# EAGLE board midi-switcher-stencil (EAGLE 9.3.0)
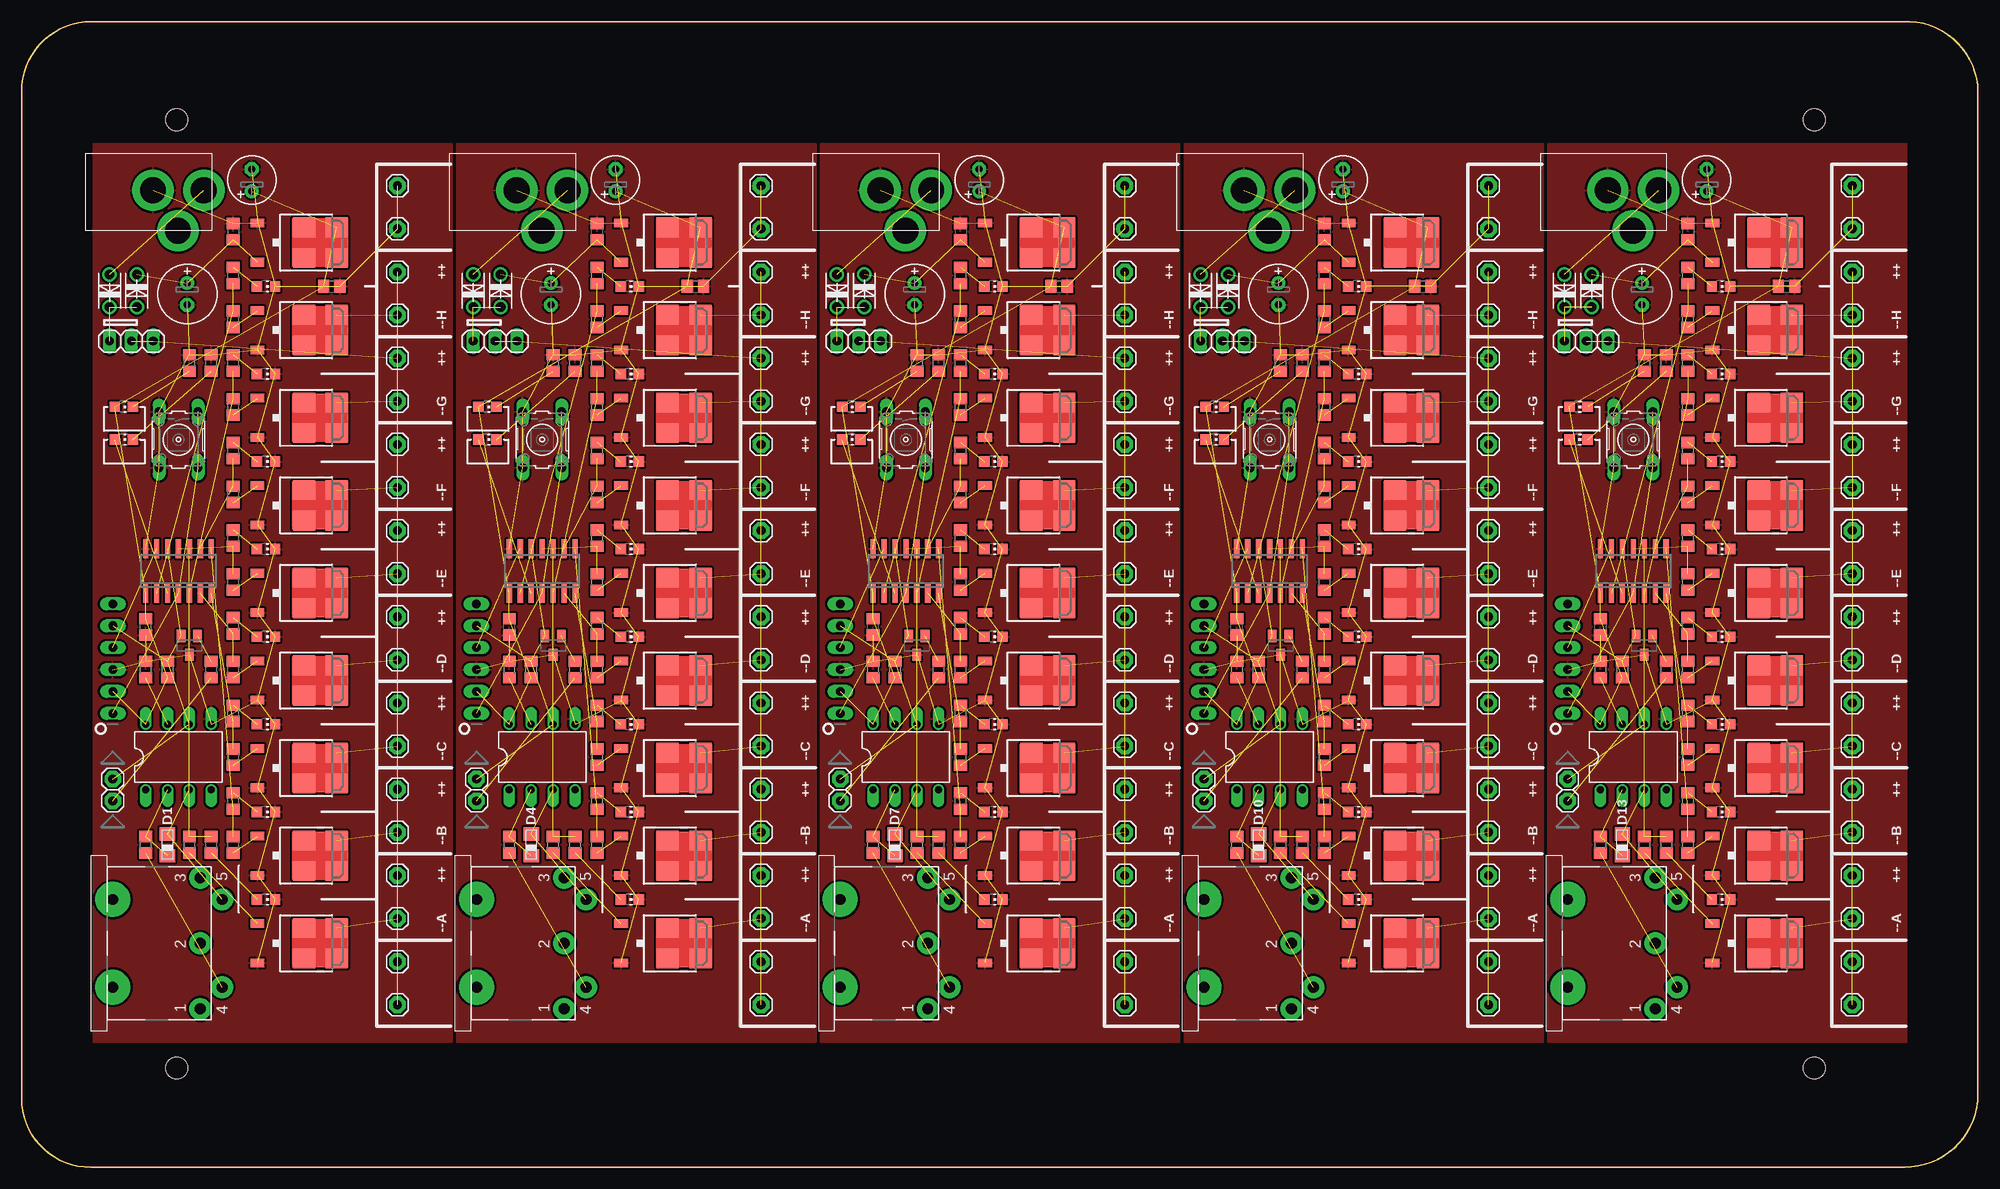
[diagram p0: board, top side]
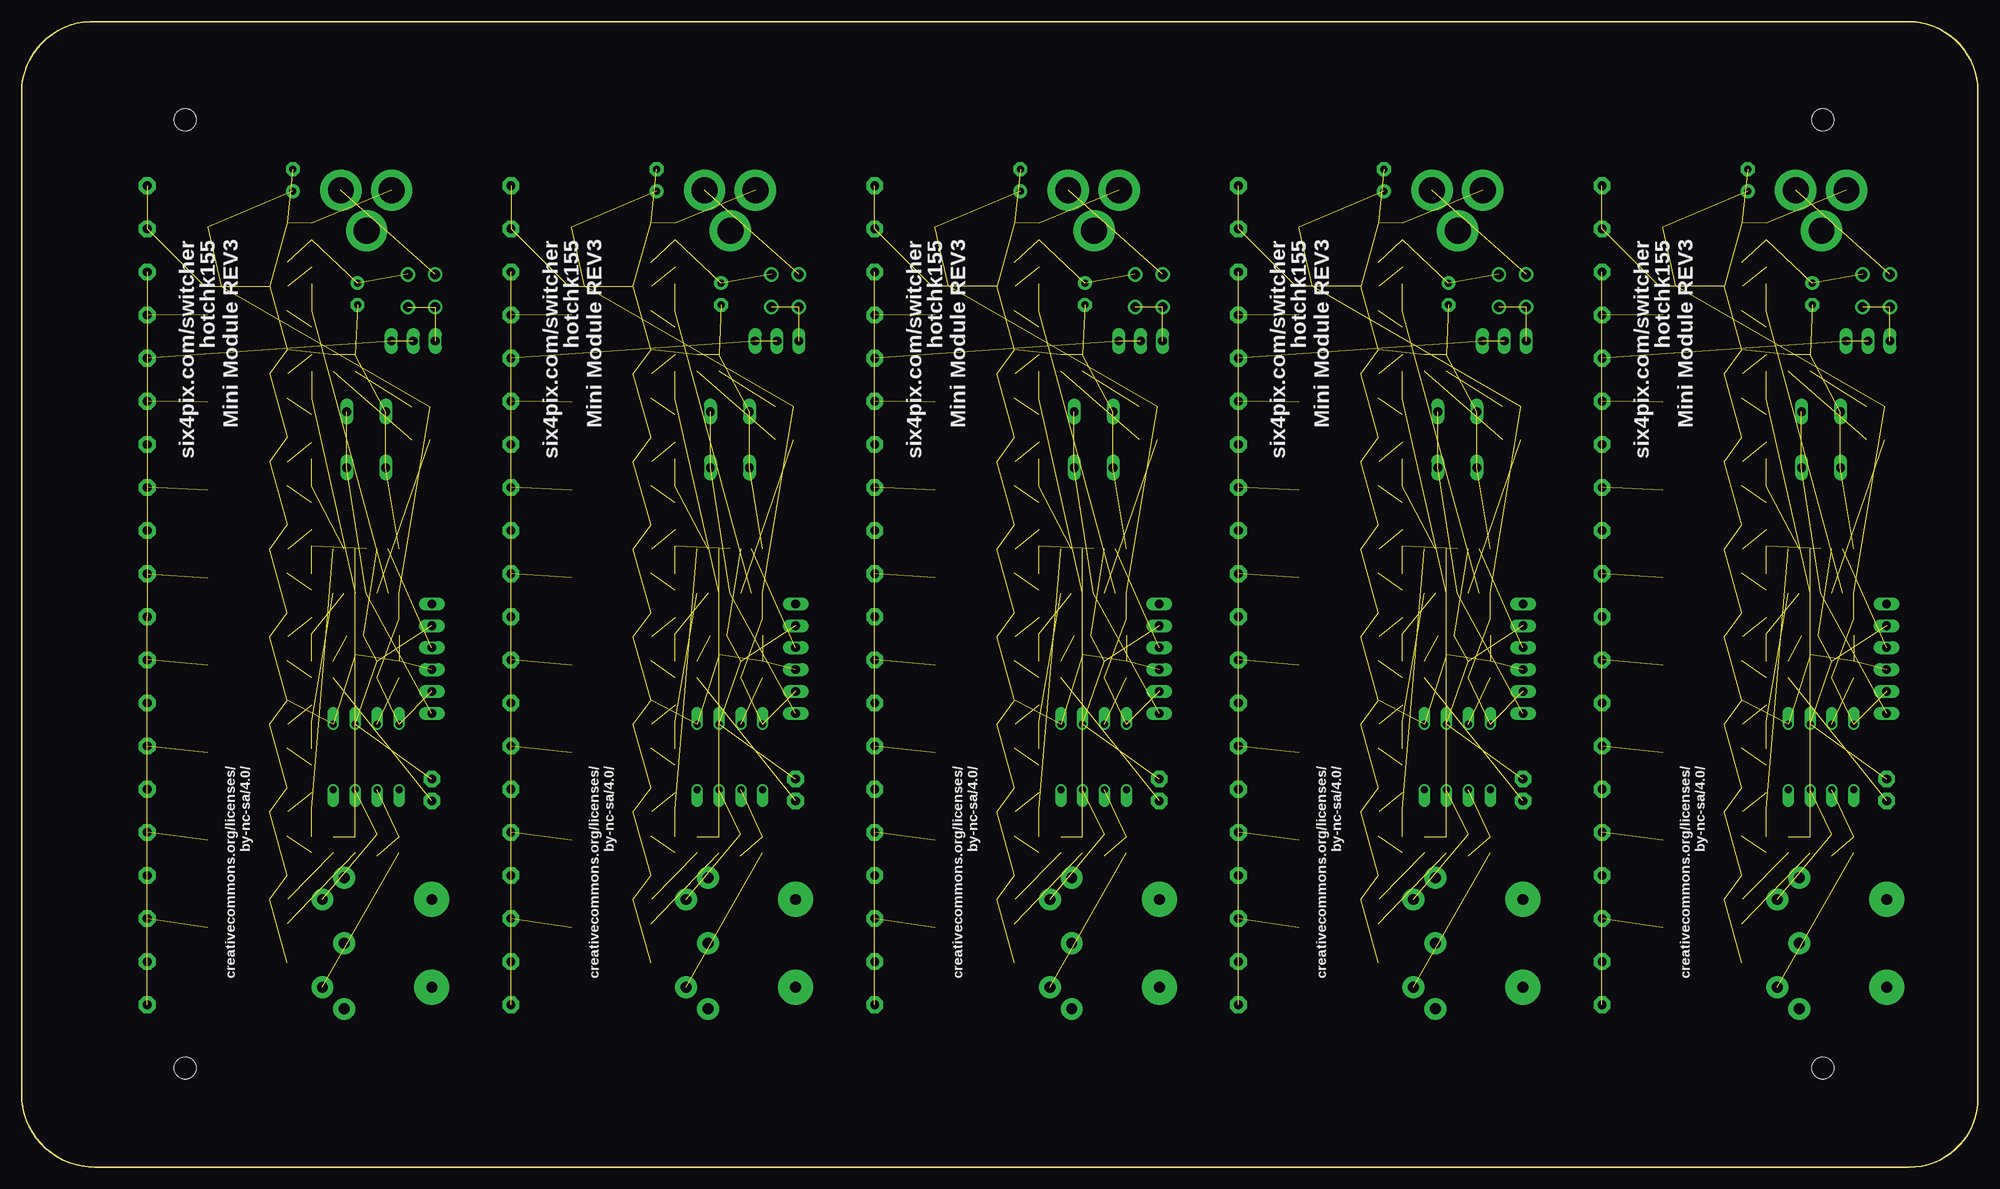
[diagram p1: board, bottom side, seen from below]

Size 227 x 132.9 mm. Coordinates in mm from the lower left corner, seen from the top.
Outline: 0,124.8 0,8 arc90 8,0 218.5,0 arc90 227,8.5 227,124.7 arc87 219.1,132.9 8.1,132.9 arc90 0,124.8
Copper layers (1*16): Top 0.035mm / dielectric 1.5mm / Bottom 0.035mm
Design rules "ITEADstudio_DRC": minimum track width 6mil, minimum drill 12mil, track to track 6mil, track to pad 6mil, pad to pad 6mil, via to via 6mil, smd to smd 0mil, copper to edge 10mil, drill to drill 10mil, minimum pad ring 10mil, minimum via ring 6mil, stop-mask expansion 2mil, vias tented up to drill 100mil, thermal gap 10mil
Holes 2.54 mm at 18,121.5 208,121.5 18,11.5 208,11.5

## Footprints (pad centres in the part's own frame; a part is rotated, then mirrored left to right if it is on the bottom)
C0805 = smd 1.3 x 1.5: 1 -0.95,0; 2 0.95,0
E2,5-7 = drill 0.813 pad 1.6: + -1.27,0 | drill 0.813 pad 1.6 octagon: - 1.27,0
E2,5-6 = drill 0.813 pad 1.6: + -1.27,0 | drill 0.813 pad 1.6 octagon: - 1.27,0
1X01 = drill 1.016 pad 1.93 octagon: 1 0,0
0805DIODE = smd 1.524 x 1.778: A -1.262,-0.005; C 1.238,-0.005
DO-VERT = drill 1.118: A 2.54,0; C -1.27,0
DIL08 = drill 0.813 offset: 1 -3.81,-3.81; 2 -1.27,-3.81; 3 1.27,-3.81; 4 3.81,-3.81; 5 3.81,3.81; 6 1.27,3.81; 7 -1.27,3.81; 8 -3.81,3.81
SO14 = smd 0.6 x 2.2: 1 -3.81,-2.6; 2 -2.54,-2.6; 3 -1.27,-2.6; 4 0,-2.6; 5 1.27,-2.6; 6 2.54,-2.6; 7 3.81,-2.6; 8 3.81,2.6; 9 2.54,2.6; 10 1.27,2.6; 11 0,2.6; 12 -1.27,2.6; 13 -2.54,2.6; 14 -3.81,2.6
DPACK = smd 1 x 1.6: 1 -2.28,-4.8; 3 2.28,-4.8 | smd 2.286 x 2.54: 2 -1.778,4.405; 4 1.778,4.405; 5 -1.778,0.595; 6 1.778,0.595
1X06_OVAL = drill 1 long: 1 -6.35,0; 2 -3.81,0; 3 -1.27,0; 4 1.27,0; 5 3.81,0; 6 6.35,0
1X03 = drill 1.016 long: 1 -2.54,0; 2 0,0; 3 2.54,0
CHIP-LED0805 = smd 1.2 x 1.2: A 0,-1.05; C 0,1.05
TRUCONN90 = drill 1.27 pad 2.54: 1 7.62,5.08; 2 0,5.08; 3 -7.62,5.08; 4 5.08,7.62; 5 -5.08,7.62 | drill 1.27 pad 4.064: NC -5.08,-5.08; NC@ 5.08,-5.08
B3F-10XX = drill 1.016 long: 1 -3.251,2.261; 2 3.251,2.261; 3 -3.251,-2.261; 4 3.251,-2.261
SOT23-BEC = smd 1 x 1.4: B -0.95,-1.1; C 0,1.1; E 0.95,-1.1
R0805 = smd 1.3 x 1.5: 1 -0.95,0; 2 0.95,0
PJ-102A = drill 3 pad 4.8: RING 0.1,-3.39; RING_SW -4.6,-6.29; TIP 0.1,-9.29

## Placement (x,y rotation side)
C1  [C0805]  14.4,62.68 90 top
C2  [C0805]  35.99,102.18 0 top
C3  [C0805]  24.56,108.53 270 top
C4  [E2,5-7]  19.23,101.29 270 top
C5  [E2,5-6]  26.72,114.5 90 top
C6  [C0805]  78.19,102.18 0 top
C7  [C0805]  56.6,62.68 90 top
C8  [C0805]  66.76,108.53 270 top
C9  [E2,5-6]  68.92,114.5 90 top
C10  [E2,5-7]  61.43,101.29 270 top
C11  [C0805]  120.39,102.18 0 top
C12  [C0805]  98.8,62.68 90 top
C13  [C0805]  108.96,108.53 270 top
C14  [E2,5-6]  111.12,114.5 90 top
C15  [E2,5-7]  103.63,101.29 270 top
C16  [C0805]  162.59,102.18 0 top
C17  [C0805]  141,62.68 90 top
C18  [C0805]  151.16,108.53 270 top
C19  [E2,5-6]  153.32,114.5 90 top
C20  [E2,5-7]  145.83,101.29 270 top
C21  [C0805]  204.79,102.18 0 top
C22  [C0805]  183.2,62.68 90 top
C23  [C0805]  193.36,108.53 270 top
C24  [E2,5-6]  195.52,114.5 90 top
C25  [E2,5-7]  188.03,101.29 270 top
CHAIN_NEXT  [1X01]  10.59,45.03 90 top
CHAIN_NEXT1  [1X01]  52.79,45.03 90 top
CHAIN_NEXT2  [1X01]  94.99,45.03 90 top
CHAIN_NEXT3  [1X01]  137.19,45.03 90 top
CHAIN_NEXT4  [1X01]  179.39,45.03 90 top
CHAIN_PREV  [1X01]  10.59,42.49 90 top
CHAIN_PREV1  [1X01]  52.79,42.49 90 top
CHAIN_PREV2  [1X01]  94.99,42.49 90 top
CHAIN_PREV3  [1X01]  137.19,42.49 90 top
CHAIN_PREV4  [1X01]  179.39,42.49 90 top
D1  0805DIODE  [0805DIODE]  16.94,37.41 90 top
D2  1N4004  [DO-VERT]  10.21,101.04 90 top
D3  1N4004  [DO-VERT]  13.38,102.31 270 top
D4  0805DIODE  [0805DIODE]  59.14,37.41 90 top
D5  1N4004  [DO-VERT]  55.58,102.31 270 top
D6  1N4004  [DO-VERT]  52.41,101.04 90 top
D7  0805DIODE  [0805DIODE]  101.34,37.41 90 top
D8  1N4004  [DO-VERT]  97.78,102.31 270 top
D9  1N4004  [DO-VERT]  94.61,101.04 90 top
D10  0805DIODE  [0805DIODE]  143.54,37.41 90 top
D11  1N4004  [DO-VERT]  139.98,102.31 270 top
D12  1N4004  [DO-VERT]  136.81,101.04 90 top
D13  0805DIODE  [0805DIODE]  185.74,37.41 90 top
D14  1N4004  [DO-VERT]  182.18,102.31 270 top
D15  1N4004  [DO-VERT]  179.01,101.04 90 top
E$1  [STENCILPIN]  18,121.5 0 top
E$2  [STENCILPIN]  208,121.5 0 top
E$3  [STENCILPIN]  208,11.5 0 top
E$4  [STENCILPIN]  18,11.5 0 top
IC1  6N138  [DIL08]  18.21,47.57 0 top
IC2  PIC16F1825SO14  [SO14]  18.21,69.16 0 top
IC3  LD1086  [DPACK]  32.18,107.26 270 top
IC4  PIC16F1825SO14  [SO14]  60.41,69.16 0 top
IC5  6N138  [DIL08]  60.41,47.57 0 top
IC6  LD1086  [DPACK]  74.38,107.26 270 top
IC7  PIC16F1825SO14  [SO14]  102.61,69.16 0 top
IC8  6N138  [DIL08]  102.61,47.57 0 top
IC9  LD1086  [DPACK]  116.58,107.26 270 top
IC10  PIC16F1825SO14  [SO14]  144.81,69.16 0 top
IC11  6N138  [DIL08]  144.81,47.57 0 top
IC12  LD1086  [DPACK]  158.78,107.26 270 top
IC13  PIC16F1825SO14  [SO14]  187.01,69.16 0 top
IC14  6N138  [DIL08]  187.01,47.57 0 top
IC15  LD1086  [DPACK]  200.98,107.26 270 top
ICSP  [1X06_OVAL]  10.59,59 90 top
ICSP1  [1X06_OVAL]  52.79,59 90 top
ICSP2  [1X06_OVAL]  94.99,59 90 top
ICSP3  [1X06_OVAL]  137.19,59 90 top
ICSP4  [1X06_OVAL]  179.39,59 90 top
JP1  [1X03]  54.95,95.83 0 top
JP2  [1X03]  97.15,95.83 0 top
JP3  [1X03]  12.75,95.83 0 top
JP4  [1X03]  139.35,95.83 0 top
JP5  [1X03]  181.55,95.83 0 top
L1  [CHIP-LED0805]  11.86,84.4 270 top
L2  [CHIP-LED0805]  11.86,88.21 270 top
L3  [CHIP-LED0805]  28.37,31.06 270 top
L4  [CHIP-LED0805]  28.37,41.22 270 top
L5  [CHIP-LED0805]  28.37,51.38 270 top
L6  [CHIP-LED0805]  28.37,61.54 270 top
L7  [CHIP-LED0805]  28.37,71.7 270 top
L8  [CHIP-LED0805]  28.37,81.86 270 top
L9  [CHIP-LED0805]  28.37,92.02 270 top
L10  [CHIP-LED0805]  28.37,102.18 270 top
L11  [CHIP-LED0805]  70.57,102.18 270 top
L12  [CHIP-LED0805]  70.57,92.02 270 top
L13  [CHIP-LED0805]  70.57,81.86 270 top
L14  [CHIP-LED0805]  70.57,71.7 270 top
L15  [CHIP-LED0805]  70.57,61.54 270 top
L16  [CHIP-LED0805]  70.57,51.38 270 top
L17  [CHIP-LED0805]  70.57,41.22 270 top
L18  [CHIP-LED0805]  70.57,31.06 270 top
L19  [CHIP-LED0805]  54.06,88.21 270 top
L20  [CHIP-LED0805]  54.06,84.4 270 top
L21  [CHIP-LED0805]  112.77,102.18 270 top
L22  [CHIP-LED0805]  112.77,92.02 270 top
L23  [CHIP-LED0805]  112.77,81.86 270 top
L24  [CHIP-LED0805]  112.77,71.7 270 top
L25  [CHIP-LED0805]  112.77,61.54 270 top
L26  [CHIP-LED0805]  112.77,51.38 270 top
L27  [CHIP-LED0805]  112.77,41.22 270 top
L28  [CHIP-LED0805]  112.77,31.06 270 top
L29  [CHIP-LED0805]  96.26,88.21 270 top
L30  [CHIP-LED0805]  96.26,84.4 270 top
L31  [CHIP-LED0805]  154.97,102.18 270 top
L32  [CHIP-LED0805]  154.97,92.02 270 top
L33  [CHIP-LED0805]  154.97,81.86 270 top
L34  [CHIP-LED0805]  154.97,71.7 270 top
L35  [CHIP-LED0805]  154.97,61.54 270 top
L36  [CHIP-LED0805]  154.97,51.38 270 top
L37  [CHIP-LED0805]  154.97,41.22 270 top
L38  [CHIP-LED0805]  154.97,31.06 270 top
L39  [CHIP-LED0805]  138.46,88.21 270 top
L40  [CHIP-LED0805]  138.46,84.4 270 top
L41  [CHIP-LED0805]  197.17,102.18 270 top
L42  [CHIP-LED0805]  197.17,92.02 270 top
L43  [CHIP-LED0805]  197.17,81.86 270 top
L44  [CHIP-LED0805]  197.17,71.7 270 top
L45  [CHIP-LED0805]  197.17,61.54 270 top
L46  [CHIP-LED0805]  197.17,51.38 270 top
L47  [CHIP-LED0805]  197.17,41.22 270 top
L48  [CHIP-LED0805]  197.17,31.06 270 top
L49  [CHIP-LED0805]  180.66,88.21 270 top
L50  [CHIP-LED0805]  180.66,84.4 270 top
MIDI_IN  DIN5PIN"  [TRUCONN90]  15.67,25.98 270 top
MIDI_IN1  DIN5PIN"  [TRUCONN90]  57.87,25.98 270 top
MIDI_IN2  DIN5PIN"  [TRUCONN90]  100.07,25.98 270 top
MIDI_IN3  DIN5PIN"  [TRUCONN90]  142.27,25.98 270 top
MIDI_IN4  DIN5PIN"  [TRUCONN90]  184.47,25.98 270 top
MODE  [B3F-10XX]  18.21,84.4 270 top
MODE1  [B3F-10XX]  60.41,84.4 270 top
MODE2  [B3F-10XX]  102.61,84.4 270 top
MODE3  [B3F-10XX]  144.81,84.4 270 top
MODE4  [B3F-10XX]  187.01,84.4 270 top
OP1+  [1X01]  43.61,33.85 90 top
OP1+1  [1X01]  85.81,33.85 90 top
OP1+2  [1X01]  128.01,33.85 90 top
OP1+3  [1X01]  170.21,33.85 90 top
OP1+4  [1X01]  212.41,33.85 90 top
OP1-  [1X01]  43.61,98.85 90 top
OP1-1  [1X01]  85.81,98.85 90 top
OP1-2  [1X01]  128.01,98.85 90 top
OP1-3  [1X01]  170.21,98.85 90 top
OP1-4  [1X01]  212.41,98.85 90 top
OP2+  [1X01]  43.61,103.85 90 top
OP2+1  [1X01]  85.81,103.85 90 top
OP2+2  [1X01]  128.01,103.85 90 top
OP2+3  [1X01]  170.21,103.85 90 top
OP2+4  [1X01]  212.41,103.85 90 top
OP2-  [1X01]  43.61,88.85 90 top
OP2-1  [1X01]  85.81,88.85 90 top
OP2-2  [1X01]  128.01,88.85 90 top
OP2-3  [1X01]  170.21,88.85 90 top
OP2-4  [1X01]  212.41,88.85 90 top
OP3+  [1X01]  43.61,93.85 90 top
OP3+1  [1X01]  85.81,93.85 90 top
OP3+2  [1X01]  128.01,93.85 90 top
OP3+3  [1X01]  170.21,93.85 90 top
OP3+4  [1X01]  212.41,93.85 90 top
OP3-  [1X01]  43.61,78.85 90 top
OP3-1  [1X01]  85.81,78.85 90 top
OP3-2  [1X01]  128.01,78.85 90 top
OP3-3  [1X01]  170.21,78.85 90 top
OP3-4  [1X01]  212.41,78.85 90 top
OP4+  [1X01]  43.61,83.85 90 top
OP4+1  [1X01]  85.81,83.85 90 top
OP4+2  [1X01]  128.01,83.85 90 top
OP4+3  [1X01]  170.21,83.85 90 top
OP4+4  [1X01]  212.41,83.85 90 top
OP4-  [1X01]  43.61,68.85 90 top
OP4-1  [1X01]  85.81,68.85 90 top
OP4-2  [1X01]  128.01,68.85 90 top
OP4-3  [1X01]  170.21,68.85 90 top
OP4-4  [1X01]  212.41,68.85 90 top
OP5+  [1X01]  43.61,73.85 90 top
OP5+1  [1X01]  85.81,73.85 90 top
OP5+2  [1X01]  128.01,73.85 90 top
OP5+3  [1X01]  170.21,73.85 90 top
OP5+4  [1X01]  212.41,73.85 90 top
OP5-  [1X01]  43.61,58.85 90 top
OP5-1  [1X01]  85.81,58.85 90 top
OP5-2  [1X01]  128.01,58.85 90 top
OP5-3  [1X01]  170.21,58.85 90 top
OP5-4  [1X01]  212.41,58.85 90 top
OP6-  [1X01]  43.61,48.85 90 top
OP6-1  [1X01]  85.81,48.85 90 top
OP6-2  [1X01]  128.01,48.85 90 top
OP6-3  [1X01]  170.21,48.85 90 top
OP6-4  [1X01]  212.41,48.85 90 top
OP7+  [1X01]  43.61,53.85 90 top
OP7+1  [1X01]  85.81,53.85 90 top
OP7+2  [1X01]  128.01,53.85 90 top
OP7+3  [1X01]  170.21,53.85 90 top
OP7+4  [1X01]  212.41,53.85 90 top
OP7-  [1X01]  43.61,38.85 90 top
OP7-1  [1X01]  85.81,38.85 90 top
OP7-2  [1X01]  128.01,38.85 90 top
OP7-3  [1X01]  170.21,38.85 90 top
OP7-4  [1X01]  212.41,38.85 90 top
OP8+  [1X01]  43.61,43.85 90 top
OP8+1  [1X01]  43.61,63.85 90 top
OP8+2  [1X01]  85.81,43.85 90 top
OP8+3  [1X01]  85.81,63.85 90 top
OP8+4  [1X01]  128.01,43.85 90 top
OP8+5  [1X01]  128.01,63.85 90 top
OP8+6  [1X01]  170.21,43.85 90 top
OP8+7  [1X01]  170.21,63.85 90 top
OP8+8  [1X01]  212.41,43.85 90 top
OP8+9  [1X01]  212.41,63.85 90 top
OP8-  [1X01]  43.61,28.85 90 top
OP8-1  [1X01]  85.81,28.85 90 top
OP8-2  [1X01]  128.01,28.85 90 top
OP8-3  [1X01]  170.21,28.85 90 top
OP8-4  [1X01]  212.41,28.85 90 top
POWER+1  [1X01]  43.61,23.85 90 top
POWER+2  [1X01]  43.61,18.85 90 top
POWER+3  [1X01]  85.81,23.85 90 top
POWER+4  [1X01]  85.81,18.85 90 top
POWER+5  [1X01]  128.01,23.85 90 top
POWER+6  [1X01]  128.01,18.85 90 top
POWER+7  [1X01]  170.21,23.85 90 top
POWER+8  [1X01]  170.21,18.85 90 top
POWER+9  [1X01]  212.41,23.85 90 top
POWER+10  [1X01]  212.41,18.85 90 top
POWER-1  [1X01]  43.61,113.85 90 top
POWER-2  [1X01]  43.61,108.85 90 top
POWER-3  [1X01]  85.81,113.85 90 top
POWER-4  [1X01]  85.81,108.85 90 top
POWER-5  [1X01]  128.01,113.85 90 top
POWER-6  [1X01]  128.01,108.85 90 top
POWER-7  [1X01]  170.21,113.85 90 top
POWER-8  [1X01]  170.21,108.85 90 top
POWER-9  [1X01]  212.41,113.85 90 top
POWER-10  [1X01]  212.41,108.85 90 top
Q1  MJD122GDPAK  [DPACK]  32.18,25.98 270 top
Q2  MJD122GDPAK  [DPACK]  32.18,36.14 270 top
Q3  MJD122GDPAK  [DPACK]  32.18,46.3 270 top
Q4  MJD122GDPAK  [DPACK]  32.18,56.46 270 top
Q5  MJD122GDPAK  [DPACK]  32.18,66.62 270 top
Q6  MJD122GDPAK  [DPACK]  32.18,76.78 270 top
Q7  MJD122GDPAK  [DPACK]  32.18,86.94 270 top
Q8  MJD122GDPAK  [DPACK]  32.18,97.1 270 top
Q9  [SOT23-BEC]  19.48,60.52 180 top
Q10  MJD122GDPAK  [DPACK]  74.38,97.1 270 top
Q11  MJD122GDPAK  [DPACK]  74.38,86.94 270 top
Q12  MJD122GDPAK  [DPACK]  74.38,76.78 270 top
Q13  MJD122GDPAK  [DPACK]  74.38,66.62 270 top
Q14  MJD122GDPAK  [DPACK]  74.38,56.46 270 top
Q15  MJD122GDPAK  [DPACK]  74.38,46.3 270 top
Q16  MJD122GDPAK  [DPACK]  74.38,36.14 270 top
Q17  MJD122GDPAK  [DPACK]  74.38,25.98 270 top
Q18  [SOT23-BEC]  61.68,60.52 180 top
Q19  MJD122GDPAK  [DPACK]  116.58,97.1 270 top
Q20  MJD122GDPAK  [DPACK]  116.58,86.94 270 top
Q21  MJD122GDPAK  [DPACK]  116.58,76.78 270 top
Q22  MJD122GDPAK  [DPACK]  116.58,66.62 270 top
Q23  MJD122GDPAK  [DPACK]  116.58,56.46 270 top
Q24  MJD122GDPAK  [DPACK]  116.58,46.3 270 top
Q25  MJD122GDPAK  [DPACK]  116.58,36.14 270 top
Q26  MJD122GDPAK  [DPACK]  116.58,25.98 270 top
Q27  [SOT23-BEC]  103.88,60.52 180 top
Q28  MJD122GDPAK  [DPACK]  158.78,97.1 270 top
Q29  MJD122GDPAK  [DPACK]  158.78,86.94 270 top
Q30  MJD122GDPAK  [DPACK]  158.78,76.78 270 top
Q31  MJD122GDPAK  [DPACK]  158.78,66.62 270 top
Q32  MJD122GDPAK  [DPACK]  158.78,56.46 270 top
Q33  MJD122GDPAK  [DPACK]  158.78,46.3 270 top
Q34  MJD122GDPAK  [DPACK]  158.78,36.14 270 top
Q35  MJD122GDPAK  [DPACK]  158.78,25.98 270 top
Q36  [SOT23-BEC]  146.08,60.52 180 top
Q37  MJD122GDPAK  [DPACK]  200.98,97.1 270 top
Q38  MJD122GDPAK  [DPACK]  200.98,86.94 270 top
Q39  MJD122GDPAK  [DPACK]  200.98,76.78 270 top
Q40  MJD122GDPAK  [DPACK]  200.98,66.62 270 top
Q41  MJD122GDPAK  [DPACK]  200.98,56.46 270 top
Q42  MJD122GDPAK  [DPACK]  200.98,46.3 270 top
Q43  MJD122GDPAK  [DPACK]  200.98,36.14 270 top
Q44  MJD122GDPAK  [DPACK]  200.98,25.98 270 top
Q45  [SOT23-BEC]  188.28,60.52 180 top
R1  [R0805]  14.4,37.41 270 top
R2  [R0805]  19.48,37.41 90 top
R3  [R0805]  22.02,37.41 270 top
R4  [R0805]  56.6,37.41 270 top
R5  [R0805]  59.14,57.73 270 top
R6  [R0805]  56.6,57.73 270 top
R7  [R0805]  24.56,37.41 90 top
R8  [R0805]  24.56,42.49 90 top
R9  [R0805]  24.56,47.57 90 top
R10  [R0805]  24.56,52.65 90 top
R11  [R0805]  24.56,57.73 90 top
R12  [R0805]  24.56,62.81 90 top
R13  [R0805]  24.56,67.89 90 top
R14  [R0805]  24.56,72.97 90 top
R15  [R0805]  24.56,78.05 90 top
R16  [R0805]  24.56,83.13 90 top
R17  [R0805]  24.56,88.21 90 top
R18  [R0805]  24.56,93.29 90 top
R19  [R0805]  24.56,98.37 90 top
R20  [R0805]  24.56,103.45 90 top
R21  [R0805]  14.4,57.73 270 top
R22  [R0805]  16.94,57.73 270 top
R23  [R0805]  22.02,57.73 90 top
R24  [R0805]  19.48,93.29 90 top
R25  [R0805]  22.02,93.29 90 top
R26  [R0805]  66.76,98.37 90 top
R27  [R0805]  66.76,88.21 90 top
R28  [R0805]  66.76,78.05 90 top
R29  [R0805]  66.76,67.89 90 top
R30  [R0805]  66.76,57.73 90 top
R31  [R0805]  66.76,47.57 90 top
R32  [R0805]  66.76,37.41 90 top
R33  [R0805]  61.68,37.41 90 top
R34  [R0805]  66.76,103.45 90 top
R35  [R0805]  66.76,93.29 90 top
R36  [R0805]  66.76,83.13 90 top
R37  [R0805]  66.76,72.97 90 top
R38  [R0805]  66.76,62.81 90 top
R39  [R0805]  66.76,52.65 90 top
R40  [R0805]  66.76,42.49 90 top
R41  [R0805]  64.22,37.41 270 top
R42  [R0805]  61.68,93.29 90 top
R43  [R0805]  64.22,93.29 90 top
R44  [R0805]  64.22,57.73 90 top
R45  [R0805]  98.8,37.41 270 top
R46  [R0805]  101.34,57.73 270 top
R47  [R0805]  98.8,57.73 270 top
R48  [R0805]  108.96,98.37 90 top
R49  [R0805]  108.96,88.21 90 top
R50  [R0805]  108.96,78.05 90 top
R51  [R0805]  108.96,67.89 90 top
R52  [R0805]  108.96,57.73 90 top
R53  [R0805]  108.96,47.57 90 top
R54  [R0805]  108.96,37.41 90 top
R55  [R0805]  103.88,37.41 90 top
R56  [R0805]  108.96,103.45 90 top
R57  [R0805]  108.96,93.29 90 top
R58  [R0805]  108.96,83.13 90 top
R59  [R0805]  108.96,72.97 90 top
R60  [R0805]  108.96,62.81 90 top
R61  [R0805]  108.96,52.65 90 top
R62  [R0805]  108.96,42.49 90 top
R63  [R0805]  106.42,37.41 270 top
R64  [R0805]  103.88,93.29 90 top
R65  [R0805]  106.42,93.29 90 top
R66  [R0805]  106.42,57.73 90 top
R67  [R0805]  141,37.41 270 top
R68  [R0805]  143.54,57.73 270 top
R69  [R0805]  141,57.73 270 top
R70  [R0805]  151.16,98.37 90 top
R71  [R0805]  151.16,88.21 90 top
R72  [R0805]  151.16,78.05 90 top
R73  [R0805]  151.16,67.89 90 top
R74  [R0805]  151.16,57.73 90 top
R75  [R0805]  151.16,47.57 90 top
R76  [R0805]  151.16,37.41 90 top
R77  [R0805]  146.08,37.41 90 top
R78  [R0805]  151.16,103.45 90 top
R79  [R0805]  151.16,93.29 90 top
R80  [R0805]  151.16,83.13 90 top
R81  [R0805]  151.16,72.97 90 top
R82  [R0805]  151.16,62.81 90 top
R83  [R0805]  151.16,52.65 90 top
R84  [R0805]  151.16,42.49 90 top
R85  [R0805]  148.62,37.41 270 top
R86  [R0805]  146.08,93.29 90 top
R87  [R0805]  148.62,93.29 90 top
R88  [R0805]  148.62,57.73 90 top
R89  [R0805]  183.2,37.41 270 top
R90  [R0805]  185.74,57.73 270 top
R91  [R0805]  183.2,57.73 270 top
R92  [R0805]  193.36,98.37 90 top
R93  [R0805]  193.36,88.21 90 top
R94  [R0805]  193.36,78.05 90 top
R95  [R0805]  193.36,67.89 90 top
R96  [R0805]  193.36,57.73 90 top
R97  [R0805]  193.36,47.57 90 top
R98  [R0805]  193.36,37.41 90 top
R99  [R0805]  188.28,37.41 90 top
R100  [R0805]  193.36,103.45 90 top
R101  [R0805]  193.36,93.29 90 top
R102  [R0805]  193.36,83.13 90 top
R103  [R0805]  193.36,72.97 90 top
R104  [R0805]  193.36,62.81 90 top
R105  [R0805]  193.36,52.65 90 top
R106  [R0805]  193.36,42.49 90 top
R107  [R0805]  190.82,37.41 270 top
R108  [R0805]  188.28,93.29 90 top
R109  [R0805]  190.82,93.29 90 top
R110  [R0805]  190.82,57.73 90 top
U$1  2.1MMJACKTHM  [PJ-102A]  11.86,113.23 90 top
U$2  2.1MMJACKTHM  [PJ-102A]  54.06,113.23 90 top
U$3  2.1MMJACKTHM  [PJ-102A]  96.26,113.23 90 top
U$4  2.1MMJACKTHM  [PJ-102A]  138.46,113.23 90 top
U$5  2.1MMJACKTHM  [PJ-102A]  180.66,113.23 90 top

## Library data of the parts
C1-C25 R1-R110 = rcl
CHAIN_NEXT CHAIN_NEXT1-CHAIN_NEXT4 CHAIN_PREV CHAIN_PREV1-CHAIN_PREV4 OP1+ OP1+1-OP1+4 OP1- OP1-1-OP1-4 OP2+ OP2+1-OP2+4 OP2- OP2-1-OP2-4 OP3+ OP3+1-OP3+4 OP3- OP3-1-OP3-4 OP4+ OP4+1-OP4+4 OP4- OP4-1-OP4-4 OP5+ OP5+1-OP5+4 OP5- OP5-1-OP5-4 OP6- OP6-1-OP6-4 OP7+ OP7+1-OP7+4 OP7- OP7-1-OP7-4 OP8+ OP8+1-OP8+9 OP8- OP8-1-OP8-4 POWER+1-POWER+10 POWER-1-POWER-10 U$1-U$5 = adafruit
D1-D15 IC2 IC4 IC7 IC10 IC13 MIDI_IN MIDI_IN1-MIDI_IN4 = jasons_stuff
E$1-E$4 = jason_stencil
IC1 IC5 IC8 IC11 IC14 = optocoupler
IC3 IC6 IC9 IC12 IC15 Q1-Q8 Q10-Q17 Q19-Q26 Q28-Q35 Q37-Q44 = jason_eagle6
ICSP ICSP1-ICSP4 = microbuilder
JP1-JP5 = pinhead
L1-L50 = led
MODE MODE1-MODE4 = switch-omron
Q9 Q18 Q27 Q36 Q45 = transistor

## Nets
+5V: C1.2 C2.1 C5.+ IC1.8 IC2.1 IC3.2 ICSP.2 L2.A R22.2
+5V1: C6.1 C7.2 C9.+ IC4.1 IC5.8 IC6.2 ICSP1.2 L19.A R5.2
+5V2: C11.1 C12.2 C14.+ IC7.1 IC8.8 IC9.2 ICSP2.2 L29.A R46.2
+5V3: C16.1 C17.2 C19.+ IC10.1 IC11.8 IC12.2 ICSP3.2 L39.A R68.2
+5V4: C21.1 C22.2 C24.+ IC13.1 IC14.8 IC15.2 ICSP4.2 L49.A R90.2
+12V: JP3.2 JP3.3 OP1+.1 OP2+.1 OP3+.1 OP4+.1 OP5+.1 OP7+.1 OP8+1.1 OP8+.1 POWER+1.1 POWER+2.1
+12V1: JP1.2 JP1.3 OP1+1.1 OP2+1.1 OP3+1.1 OP4+1.1 OP5+1.1 OP7+1.1 OP8+2.1 OP8+3.1 POWER+3.1 POWER+4.1
+12V2: JP2.2 JP2.3 OP1+2.1 OP2+2.1 OP3+2.1 OP4+2.1 OP5+2.1 OP7+2.1 OP8+4.1 OP8+5.1 POWER+5.1 POWER+6.1
+12V3: JP4.2 JP4.3 OP1+3.1 OP2+3.1 OP3+3.1 OP4+3.1 OP5+3.1 OP7+3.1 OP8+6.1 OP8+7.1 POWER+7.1 POWER+8.1
+12V4: JP5.2 JP5.3 OP1+4.1 OP2+4.1 OP3+4.1 OP4+4.1 OP5+4.1 OP7+4.1 OP8+8.1 OP8+9.1 POWER+9.1 POWER+10.1
ACT_LED: IC2.3 L1.A
ACT_LED1: IC4.3 L20.A
ACT_LED2: IC7.3 L30.A
ACT_LED3: IC10.3 L40.A
ACT_LED4: IC13.3 L50.A
GND: C1.1 C2.2 C3.1 C4.- C5.- IC1.5 IC2.14 IC3.1 ICSP.3 L3.C L4.C L5.C L6.C L7.C L8.C L9.C L10.C MODE.3 MODE.4 POWER-1.1 POWER-2.1 Q1.3 Q2.3 Q3.3 Q4.3 Q5.3 Q6.3 Q7.3 Q8.3 Q9.C R21.1 R24.2 R25.2 U$1.RING
GND1: C6.2 C7.1 C8.1 C9.- C10.- IC4.14 IC5.5 IC6.1 ICSP1.3 L11.C L12.C L13.C L14.C L15.C L16.C L17.C L18.C MODE1.3 MODE1.4 POWER-3.1 POWER-4.1 Q10.3 Q11.3 Q12.3 Q13.3 Q14.3 Q15.3 Q16.3 Q17.3 Q18.C R6.1 R42.2 R43.2 U$2.RING
GND2: C11.2 C12.1 C13.1 C14.- C15.- IC7.14 IC8.5 IC9.1 ICSP2.3 L21.C L22.C L23.C L24.C L25.C L26.C L27.C L28.C MODE2.3 MODE2.4 POWER-5.1 POWER-6.1 Q19.3 Q20.3 Q21.3 Q22.3 Q23.3 Q24.3 Q25.3 Q26.3 Q27.C R47.1 R64.2 R65.2 U$3.RING
GND3: C16.2 C17.1 C18.1 C19.- C20.- IC10.14 IC11.5 IC12.1 ICSP3.3 L31.C L32.C L33.C L34.C L35.C L36.C L37.C L38.C MODE3.3 MODE3.4 POWER-7.1 POWER-8.1 Q28.3 Q29.3 Q30.3 Q31.3 Q32.3 Q33.3 Q34.3 Q35.3 Q36.C R69.1 R86.2 R87.2 U$4.RING
GND4: C21.2 C22.1 C23.1 C24.- C25.- IC13.14 IC14.5 IC15.1 ICSP4.3 L41.C L42.C L43.C L44.C L45.C L46.C L47.C L48.C MODE4.3 MODE4.4 POWER-9.1 POWER-10.1 Q37.3 Q38.3 Q39.3 Q40.3 Q41.3 Q42.3 Q43.3 Q44.3 Q45.C R91.1 R108.2 R109.2 U$5.RING
MIDI_IN: CHAIN_NEXT.1 IC1.6 IC2.12 ICSP.5 Q9.E R22.1
MIDI_IN1: CHAIN_NEXT1.1 IC4.12 IC5.6 ICSP1.5 Q18.E R5.1
MIDI_IN2: CHAIN_NEXT2.1 IC7.12 IC8.6 ICSP2.5 Q27.E R46.1
MIDI_IN3: CHAIN_NEXT3.1 IC10.12 IC11.6 ICSP3.5 Q36.E R68.1
MIDI_IN4: CHAIN_NEXT4.1 IC13.12 IC14.6 ICSP4.5 Q45.E R90.1
N$1: D1.C IC1.3 MIDI_IN.5
N$2: MIDI_IN.4 R1.2
N$3: D1.A IC1.2 R1.1
N$4: IC1.7 R21.2
N$5: L1.C R25.1
N$6: L10.A R20.2
N$7: L9.A R18.2
N$8: Q8.1 R19.1
N$9: Q7.1 R17.1
N$10: Q6.1 R15.1
N$11: Q5.1 R13.1
N$12: Q4.1 R11.1
N$13: Q3.1 R9.1
N$14: Q2.1 R7.1
N$15: Q1.1 R2.1
N$16: Q9.B R23.2
N$17: Q11.1 R27.1
N$18: CHAIN_PREV.1 R23.1
N$19: Q12.1 R28.1
N$20: Q13.1 R29.1
N$21: Q14.1 R30.1
N$22: Q15.1 R31.1
N$23: Q16.1 R32.1
N$24: L8.A R16.2
N$25: OP1-.1 Q8.2
N$26: OP2-.1 Q7.2
N$27: OP3-.1 Q6.2
N$28: L2.C R24.1
N$29: OP5-.1 Q4.2
N$30: OP6-.1 Q3.2
N$31: OP4-.1 Q5.2
N$32: Q17.1 R33.1
N$33: L7.A R14.2
N$34: L11.A R34.2
N$35: L6.A R12.2
N$36: L5.A R10.2
N$37: L4.A R8.2
N$38: L3.A R3.2
N$39: C3.2 C4.+ D3.C IC3.3
N$40: L12.A R35.2
N$41: L13.A R36.2
N$42: OP7-.1 Q2.2
N$43: D2.A U$1.TIP
N$44: L14.A R37.2
N$45: L15.A R38.2
N$46: L16.A R39.2
N$47: OP8-.1 Q1.2
N$48: L17.A R40.2
N$49: L18.A R41.2
N$50: C8.2 C10.+ D5.C IC6.3
N$51: IC2.13 ICSP.4
N$52: OP1-1.1 Q10.2
N$53: OP2-1.1 Q11.2
N$54: D2.C D3.A JP3.1
N$55: OP3-1.1 Q12.2
N$56: OP5-1.1 Q14.2
N$57: OP6-1.1 Q15.2
N$58: OP4-1.1 Q13.2
N$59: OP7-1.1 Q16.2
N$60: OP8-1.1 Q17.2
N$61: IC4.13 ICSP1.4
N$62: D6.A U$2.TIP
N$63: D5.A D6.C JP1.1
N$64: L19.C R42.1
N$65: L20.C R43.1
N$66: D4.C IC5.3 MIDI_IN1.5
N$67: MIDI_IN1.4 R4.2
N$68: D4.A IC5.2 R4.1
N$69: IC5.7 R6.2
N$70: Q18.B R44.2
N$71: CHAIN_PREV1.1 R44.1
N$72: Q10.1 R26.1
N$73: Q20.1 R49.1
N$74: Q21.1 R50.1
N$75: Q22.1 R51.1
N$76: Q23.1 R52.1
N$77: Q24.1 R53.1
N$78: Q25.1 R54.1
N$79: Q26.1 R55.1
N$80: L21.A R56.2
N$81: L22.A R57.2
N$82: L23.A R58.2
N$83: L24.A R59.2
N$84: L25.A R60.2
N$85: L26.A R61.2
N$86: L27.A R62.2
N$87: L28.A R63.2
N$88: C13.2 C15.+ D8.C IC9.3
N$89: OP1-2.1 Q19.2
N$90: OP2-2.1 Q20.2
N$91: OP3-2.1 Q21.2
N$92: OP5-2.1 Q23.2
N$93: OP6-2.1 Q24.2
N$94: OP4-2.1 Q22.2
N$95: OP7-2.1 Q25.2
N$96: OP8-2.1 Q26.2
N$97: IC7.13 ICSP2.4
N$98: D9.A U$3.TIP
N$99: D8.A D9.C JP2.1
N$100: L29.C R64.1
N$101: L30.C R65.1
N$102: D7.C IC8.3 MIDI_IN2.5
N$103: MIDI_IN2.4 R45.2
N$104: D7.A IC8.2 R45.1
N$105: IC8.7 R47.2
N$106: Q27.B R66.2
N$107: CHAIN_PREV2.1 R66.1
N$108: Q19.1 R48.1
N$109: Q29.1 R71.1
N$110: Q30.1 R72.1
N$111: Q31.1 R73.1
N$112: Q32.1 R74.1
N$113: Q33.1 R75.1
N$114: Q34.1 R76.1
N$115: Q35.1 R77.1
N$116: L31.A R78.2
N$117: L32.A R79.2
N$118: L33.A R80.2
N$119: L34.A R81.2
N$120: L35.A R82.2
N$121: L36.A R83.2
N$122: L37.A R84.2
N$123: L38.A R85.2
N$124: C18.2 C20.+ D11.C IC12.3
N$125: OP1-3.1 Q28.2
N$126: OP2-3.1 Q29.2
N$127: OP3-3.1 Q30.2
N$128: OP5-3.1 Q32.2
N$129: OP6-3.1 Q33.2
N$130: OP4-3.1 Q31.2
N$131: OP7-3.1 Q34.2
N$132: OP8-3.1 Q35.2
N$133: IC10.13 ICSP3.4
N$134: D12.A U$4.TIP
N$135: D11.A D12.C JP4.1
N$136: L39.C R86.1
N$137: L40.C R87.1
N$138: D10.C IC11.3 MIDI_IN3.5
N$139: MIDI_IN3.4 R67.2
N$140: D10.A IC11.2 R67.1
N$141: IC11.7 R69.2
N$142: Q36.B R88.2
N$143: CHAIN_PREV3.1 R88.1
N$144: Q28.1 R70.1
N$145: Q38.1 R93.1
N$146: Q39.1 R94.1
N$147: Q40.1 R95.1
N$148: Q41.1 R96.1
N$149: Q42.1 R97.1
N$150: Q43.1 R98.1
N$151: Q44.1 R99.1
N$152: L41.A R100.2
N$153: L42.A R101.2
N$154: L43.A R102.2
N$155: L44.A R103.2
N$156: L45.A R104.2
N$157: L46.A R105.2
N$158: L47.A R106.2
N$159: L48.A R107.2
N$160: C23.2 C25.+ D14.C IC15.3
N$161: OP1-4.1 Q37.2
N$162: OP2-4.1 Q38.2
N$163: OP3-4.1 Q39.2
N$164: OP5-4.1 Q41.2
N$165: OP6-4.1 Q42.2
N$166: OP4-4.1 Q40.2
N$167: OP7-4.1 Q43.2
N$168: OP8-4.1 Q44.2
N$169: IC13.13 ICSP4.4
N$170: D15.A U$5.TIP
N$171: D14.A D15.C JP5.1
N$172: L49.C R108.1
N$173: L50.C R109.1
N$174: D13.C IC14.3 MIDI_IN4.5
N$175: MIDI_IN4.4 R89.2
N$176: D13.A IC14.2 R89.1
N$177: IC14.7 R91.2
N$178: Q45.B R110.2
N$179: CHAIN_PREV4.1 R110.1
N$180: Q37.1 R92.1
OUT1: IC2.2 R19.2 R20.1
OUT2: IC2.5 R17.2 R18.1
OUT3: IC2.9 R15.2 R16.1
OUT4: IC2.11 R13.2 R14.1
OUT5: IC2.6 R11.2 R12.1
OUT6: IC2.7 R9.2 R10.1
OUT7: IC2.8 R7.2 R8.1
OUT8: IC2.10 R2.2 R3.1
OUT9: IC4.9 R28.2 R36.1
OUT10: IC4.11 R29.2 R37.1
OUT11: IC4.6 R30.2 R38.1
OUT12: IC4.7 R31.2 R39.1
OUT13: IC4.5 R27.2 R35.1
OUT14: IC4.2 R26.2 R34.1
OUT15: IC4.10 R33.2 R41.1
OUT16: IC4.8 R32.2 R40.1
OUT17: IC7.9 R50.2 R58.1
OUT18: IC7.11 R51.2 R59.1
OUT19: IC7.6 R52.2 R60.1
OUT20: IC7.7 R53.2 R61.1
OUT21: IC7.5 R49.2 R57.1
OUT22: IC7.2 R48.2 R56.1
OUT23: IC7.10 R55.2 R63.1
OUT24: IC7.8 R54.2 R62.1
OUT25: IC10.9 R72.2 R80.1
OUT26: IC10.11 R73.2 R81.1
OUT27: IC10.6 R74.2 R82.1
OUT28: IC10.7 R75.2 R83.1
OUT29: IC10.5 R71.2 R79.1
OUT30: IC10.2 R70.2 R78.1
OUT31: IC10.10 R77.2 R85.1
OUT32: IC10.8 R76.2 R84.1
OUT33: IC13.9 R94.2 R102.1
OUT34: IC13.11 R95.2 R103.1
OUT35: IC13.6 R96.2 R104.1
OUT36: IC13.7 R97.2 R105.1
OUT37: IC13.5 R93.2 R101.1
OUT38: IC13.2 R92.2 R100.1
OUT39: IC13.10 R99.2 R107.1
OUT40: IC13.8 R98.2 R106.1
SWITCH: IC2.4 ICSP.1 MODE.1 MODE.2
SWITCH1: IC4.4 ICSP1.1 MODE1.1 MODE1.2
SWITCH2: IC7.4 ICSP2.1 MODE2.1 MODE2.2
SWITCH3: IC10.4 ICSP3.1 MODE3.1 MODE3.2
SWITCH4: IC13.4 ICSP4.1 MODE4.1 MODE4.2

## Tracks (layer width: path | path; a pad name or v marks a point on that pad's centre or on a via)
+5V  (8 unrouted)
+5V1  (8 unrouted)
+5V2  (8 unrouted)
+5V3  (8 unrouted)
+5V4  (8 unrouted)
+12V  (11 unrouted)
+12V1  (11 unrouted)
+12V2  (11 unrouted)
+12V3  (11 unrouted)
+12V4  (11 unrouted)
ACT_LED  (1 unrouted)
ACT_LED1  (1 unrouted)
ACT_LED2  (1 unrouted)
ACT_LED3  (1 unrouted)
ACT_LED4  (1 unrouted)
GND  (33 unrouted)
  pour Top (isolate 0.254): 8.3,14.55 49.96,14.55 49.96,118.69 8.3,118.69
GND1  (33 unrouted)
  pour Top (isolate 0.254): 50.5,14.55 92.16,14.55 92.16,118.69 50.5,118.69
GND2  (33 unrouted)
  pour Top (isolate 0.254): 92.7,14.55 134.36,14.55 134.36,118.69 92.7,118.69
GND3  (33 unrouted)
  pour Top (isolate 0.254): 134.9,14.55 176.56,14.55 176.56,118.69 134.9,118.69
GND4  (33 unrouted)
  pour Top (isolate 0.254): 177.1,14.55 218.76,14.55 218.76,118.69 177.1,118.69
MIDI_IN  (5 unrouted)
MIDI_IN1  (5 unrouted)
MIDI_IN2  (5 unrouted)
MIDI_IN3  (5 unrouted)
MIDI_IN4  (5 unrouted)
N$1  (2 unrouted)
N$2  (1 unrouted)
N$3  (2 unrouted)
N$4  (1 unrouted)
N$5  (1 unrouted)
N$6  (1 unrouted)
N$7  (1 unrouted)
N$8  (1 unrouted)
N$9  (1 unrouted)
N$10  (1 unrouted)
N$11  (1 unrouted)
N$12  (1 unrouted)
N$13  (1 unrouted)
N$14  (1 unrouted)
N$15  (1 unrouted)
N$16  (1 unrouted)
N$17  (1 unrouted)
N$18  (1 unrouted)
N$19  (1 unrouted)
N$20  (1 unrouted)
N$21  (1 unrouted)
N$22  (1 unrouted)
N$23  (1 unrouted)
N$24  (1 unrouted)
N$25  (1 unrouted)
N$26  (1 unrouted)
N$27  (1 unrouted)
N$28  (1 unrouted)
N$29  (1 unrouted)
N$30  (1 unrouted)
N$31  (1 unrouted)
N$32  (1 unrouted)
N$33  (1 unrouted)
N$34  (1 unrouted)
N$35  (1 unrouted)
N$36  (1 unrouted)
N$37  (1 unrouted)
N$38  (1 unrouted)
N$39  (3 unrouted)
N$40  (1 unrouted)
N$41  (1 unrouted)
N$42  (1 unrouted)
N$43  (1 unrouted)
N$44  (1 unrouted)
N$45  (1 unrouted)
N$46  (1 unrouted)
N$47  (1 unrouted)
N$48  (1 unrouted)
N$49  (1 unrouted)
N$50  (3 unrouted)
N$51  (1 unrouted)
N$52  (1 unrouted)
N$53  (1 unrouted)
N$54  (2 unrouted)
N$55  (1 unrouted)
N$56  (1 unrouted)
N$57  (1 unrouted)
N$58  (1 unrouted)
N$59  (1 unrouted)
N$60  (1 unrouted)
N$61  (1 unrouted)
N$62  (1 unrouted)
N$63  (2 unrouted)
N$64  (1 unrouted)
N$65  (1 unrouted)
N$66  (2 unrouted)
N$67  (1 unrouted)
N$68  (2 unrouted)
N$69  (1 unrouted)
N$70  (1 unrouted)
N$71  (1 unrouted)
N$72  (1 unrouted)
N$73  (1 unrouted)
N$74  (1 unrouted)
N$75  (1 unrouted)
N$76  (1 unrouted)
N$77  (1 unrouted)
N$78  (1 unrouted)
N$79  (1 unrouted)
N$80  (1 unrouted)
N$81  (1 unrouted)
N$82  (1 unrouted)
N$83  (1 unrouted)
N$84  (1 unrouted)
N$85  (1 unrouted)
N$86  (1 unrouted)
N$87  (1 unrouted)
N$88  (3 unrouted)
N$89  (1 unrouted)
N$90  (1 unrouted)
N$91  (1 unrouted)
N$92  (1 unrouted)
N$93  (1 unrouted)
N$94  (1 unrouted)
N$95  (1 unrouted)
N$96  (1 unrouted)
N$97  (1 unrouted)
N$98  (1 unrouted)
N$99  (2 unrouted)
N$100  (1 unrouted)
N$101  (1 unrouted)
N$102  (2 unrouted)
N$103  (1 unrouted)
N$104  (2 unrouted)
N$105  (1 unrouted)
N$106  (1 unrouted)
N$107  (1 unrouted)
N$108  (1 unrouted)
N$109  (1 unrouted)
N$110  (1 unrouted)
N$111  (1 unrouted)
N$112  (1 unrouted)
N$113  (1 unrouted)
N$114  (1 unrouted)
N$115  (1 unrouted)
N$116  (1 unrouted)
N$117  (1 unrouted)
N$118  (1 unrouted)
N$119  (1 unrouted)
N$120  (1 unrouted)
N$121  (1 unrouted)
N$122  (1 unrouted)
N$123  (1 unrouted)
N$124  (3 unrouted)
N$125  (1 unrouted)
N$126  (1 unrouted)
N$127  (1 unrouted)
N$128  (1 unrouted)
N$129  (1 unrouted)
N$130  (1 unrouted)
N$131  (1 unrouted)
N$132  (1 unrouted)
N$133  (1 unrouted)
N$134  (1 unrouted)
N$135  (2 unrouted)
N$136  (1 unrouted)
N$137  (1 unrouted)
N$138  (2 unrouted)
N$139  (1 unrouted)
N$140  (2 unrouted)
N$141  (1 unrouted)
N$142  (1 unrouted)
N$143  (1 unrouted)
N$144  (1 unrouted)
N$145  (1 unrouted)
N$146  (1 unrouted)
N$147  (1 unrouted)
N$148  (1 unrouted)
N$149  (1 unrouted)
N$150  (1 unrouted)
N$151  (1 unrouted)
N$152  (1 unrouted)
N$153  (1 unrouted)
N$154  (1 unrouted)
N$155  (1 unrouted)
N$156  (1 unrouted)
N$157  (1 unrouted)
N$158  (1 unrouted)
N$159  (1 unrouted)
N$160  (3 unrouted)
N$161  (1 unrouted)
N$162  (1 unrouted)
N$163  (1 unrouted)
N$164  (1 unrouted)
N$165  (1 unrouted)
N$166  (1 unrouted)
N$167  (1 unrouted)
N$168  (1 unrouted)
N$169  (1 unrouted)
N$170  (1 unrouted)
N$171  (2 unrouted)
N$172  (1 unrouted)
N$173  (1 unrouted)
N$174  (2 unrouted)
N$175  (1 unrouted)
N$176  (2 unrouted)
N$177  (1 unrouted)
N$178  (1 unrouted)
N$179  (1 unrouted)
N$180  (1 unrouted)
OUT1  (2 unrouted)
OUT2  (2 unrouted)
OUT3  (2 unrouted)
OUT4  (2 unrouted)
OUT5  (2 unrouted)
OUT6  (2 unrouted)
OUT7  (2 unrouted)
OUT8  (2 unrouted)
OUT9  (2 unrouted)
OUT10  (2 unrouted)
OUT11  (2 unrouted)
OUT12  (2 unrouted)
OUT13  (2 unrouted)
OUT14  (2 unrouted)
OUT15  (2 unrouted)
OUT16  (2 unrouted)
OUT17  (2 unrouted)
OUT18  (2 unrouted)
OUT19  (2 unrouted)
OUT20  (2 unrouted)
OUT21  (2 unrouted)
OUT22  (2 unrouted)
OUT23  (2 unrouted)
OUT24  (2 unrouted)
OUT25  (2 unrouted)
OUT26  (2 unrouted)
OUT27  (2 unrouted)
OUT28  (2 unrouted)
OUT29  (2 unrouted)
OUT30  (2 unrouted)
OUT31  (2 unrouted)
OUT32  (2 unrouted)
OUT33  (2 unrouted)
OUT34  (2 unrouted)
OUT35  (2 unrouted)
OUT36  (2 unrouted)
OUT37  (2 unrouted)
OUT38  (2 unrouted)
OUT39  (2 unrouted)
OUT40  (2 unrouted)
SWITCH  (3 unrouted)
SWITCH1  (3 unrouted)
SWITCH2  (3 unrouted)
SWITCH3  (3 unrouted)
SWITCH4  (3 unrouted)

## Text on the board
tPlace: ++ | ++ | ++ | ++ | ++ | --H | --H | --H | --H | --H | ++ | ++ | ++ | ++ | ++ | --G | --G | --G | --G | --G | ++ | ++ | ++ | ++ | ++ | --F | --F | --F | --F | --F | ++ | ++ | ++ | ++ | ++ | --E | --E | --E | --E | --E | ++ | ++ | ++ | ++ | ++ | --D | --D | --D | --D | --D | ++ | ++ | ++ | ++ | ++ | --C | --C | --C | --C | --C | ++ | ++ | ++ | ++ | ++ | --B | --B | --B | --B | --B | ++ | ++ | ++ | ++ | ++ | --A | --A | --A | --A | --A
bPlace: Mini Module REV3 | hotchk155 | six4pix.com/switcher | Mini Module REV3 | hotchk155 | six4pix.com/switcher | Mini Module REV3 | hotchk155 | six4pix.com/switcher | Mini Module REV3 | hotchk155 | six4pix.com/switcher | Mini Module REV3 | hotchk155 | six4pix.com/switcher | creativecommons.org/licenses/ / by-nc-sa/4.0/ | creativecommons.org/licenses/ / by-nc-sa/4.0/ | creativecommons.org/licenses/ / by-nc-sa/4.0/ | creativecommons.org/licenses/ / by-nc-sa/4.0/ | creativecommons.org/licenses/ / by-nc-sa/4.0/
tDocu: GROUND | GROUND | GROUND | GROUND | GROUND | H | H | H | H | H | G | G | G | G | G | F | F | F | F | F | E | E | E | E | E | ~ | ~ | ~ | ~ | ~ | D | D | D | D | D | C | ~ | C | ~ | C | ~ | C | ~ | C | ~ | B | ~ | B | ~ | B | ~ | B | ~ | B | ~ | A | ~ | A | ~ | A | ~ | A | ~ | A | ~ | POWER | POWER | POWER | POWER | POWER
_tPlace: D1 | D1 | D1 | D1 | D1
_tNames: C5 | C5 | C5 | C5 | C5 | C3 | C3 | C3 | C3 | C3 | D3 | D3 | D3 | D3 | D3 | C4 | IC3 | C4 | IC3 | C4 | IC3 | C4 | IC3 | C4 | IC3 | D2 | D2 | D2 | D2 | D2 | C2 | C2 | C2 | C2 | C2 | R25 | R25 | R25 | R25 | R25 | R24 | Q8 | R24 | Q8 | R24 | Q8 | R24 | Q8 | R24 | Q8 | Q7 | Q7 | Q7 | Q7 | Q7 | Q6 | Q6 | Q6 | Q6 | Q6 | IC2 | IC2 | IC2 | IC2 | IC2 | Q5 | Q5 | Q5 | Q5 | Q5 | Q9 | Q9 | Q9 | Q9 | Q9 | C1 | C1 | C1 | C1 | C1 | R23 | R23 | R23 | R23 | R23 | R22 | Q4 | R22 | Q4 | R22 | Q4 | R22 | Q4 | R22 | Q4 | R21 | R21 | R21 | R21 | R21 | IC1 | IC1 | IC1 | IC1 | IC1 | Q3 | Q3 | Q3 | Q3 | Q3 | R1 | R3 | R1 | R3 | R1 | R3 | R1 | R3 | R1 | R3 | R2 | R2 | R2 | R2 | R2 | Q2 | Q2 | Q2 | Q2 | Q2 | MIDI_IN | MIDI_IN | MIDI_IN | MIDI_IN | MIDI_IN | Q1 | Q1 | Q1 | Q1 | Q1